# EAGLE board wsjt (EAGLE 9.6.2)
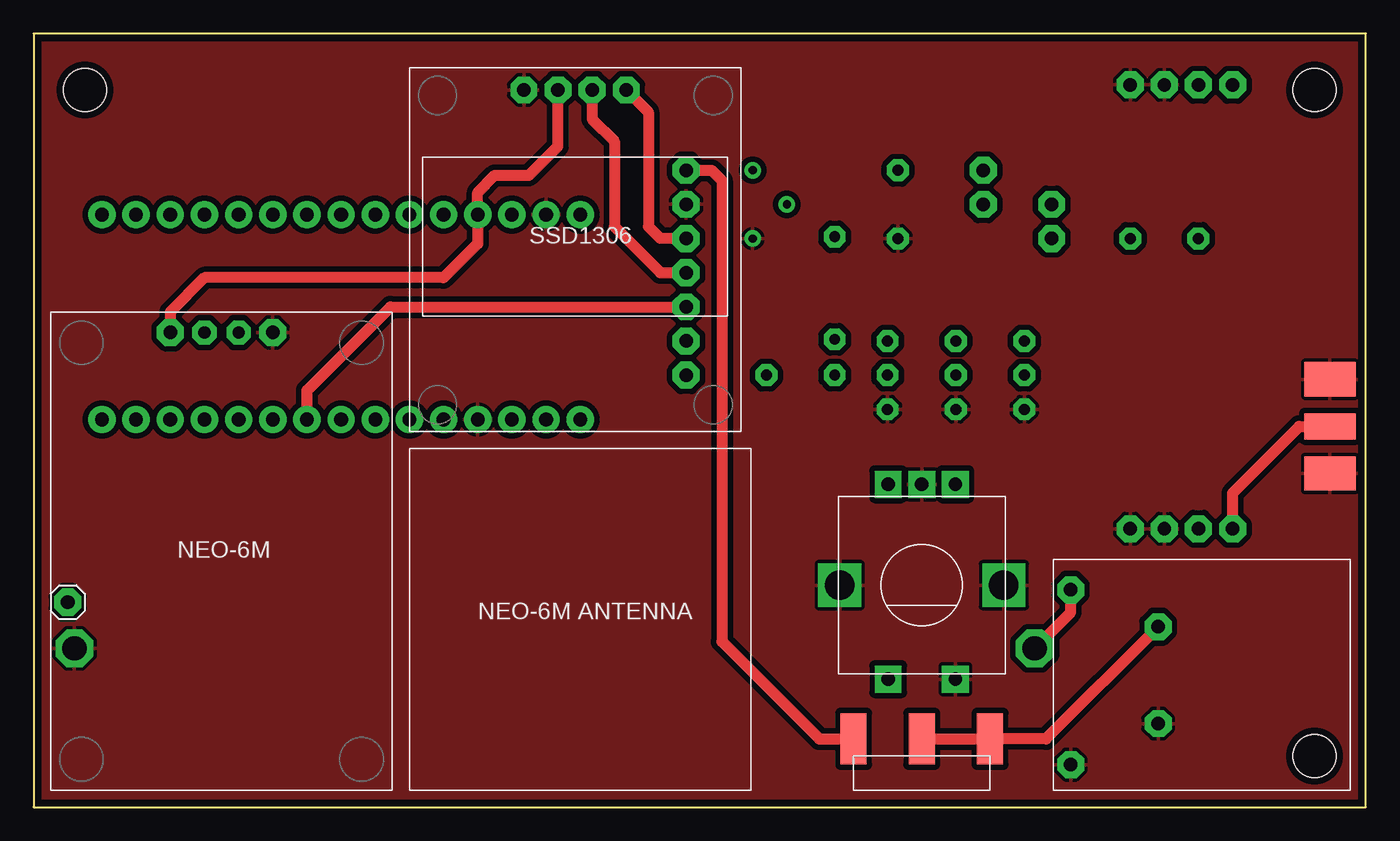
[diagram p0: board, top side]
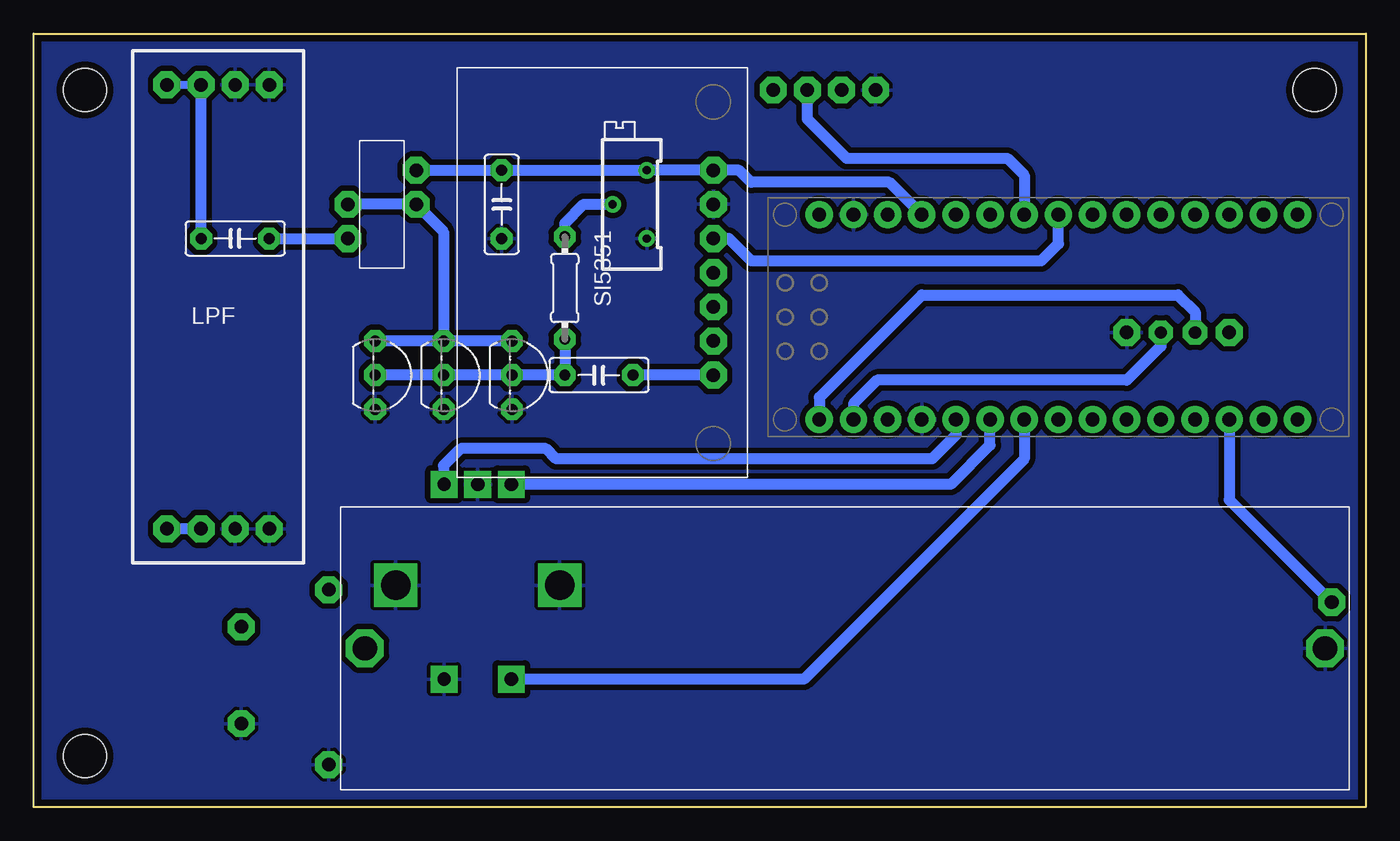
[diagram p1: board, bottom side, seen from below]

Size 99.06 x 57.53 mm. Coordinates in mm from the lower left corner, seen from the top.
Outline: 0,0 99.06,0 99.06,57.53 0,57.53 0,0
Copper layers (1*16): Top 0.035mm / dielectric 1.5mm / Bottom 0.035mm
Design rules "default *": minimum track width 6mil, minimum drill 0.35mm, track to track 6mil, track to pad 6mil, pad to pad 6mil, via to via 6mil, smd to smd 6mil, copper to edge 20mil, drill to drill 6mil, minimum pad ring 10mil, minimum via ring 8mil, stop-mask expansion 4mil, vias tented up to drill 0mil, thermal gap 10mil
Holes 3.2 mm at 3.81,53.34 95.25,3.81 95.25,53.34

## Footprints (pad centres in the part's own frame; a part is rotated, then mirrored left to right if it is on the bottom)
18650 = drill 1.8 octagon: 1 -35.7,0; 2 35.7,0
NANO = drill 1.016: 1 -7.62,17.78; 2 -7.62,15.24; 3 -7.62,12.7; 4 -7.62,10.16; 5 -7.62,7.62; 6 -7.62,5.08; 7 -7.62,2.54; 8 -7.62,0; 9 -7.62,-2.54; 10 -7.62,-5.08; 11 -7.62,-7.62; 12 -7.62,-10.16; 13 -7.62,-12.7; 14 -7.62,-15.24; 15 -7.62,-17.78; 16 7.62,-17.78; 17 7.62,-15.24; 18 7.62,-12.7; 19 7.62,-10.16; 20 7.62,-7.62; 21 7.62,-5.08; 22 7.62,-2.54; 23 7.62,0; 24 7.62,2.54; 25 7.62,5.08; 26 7.62,7.62; 27 7.62,10.16; 28 7.62,12.7; 29 7.62,15.24; 30 7.62,17.78
SSD1306 = drill 1 octagon: 1 11.049,25.4; 2 8.509,25.4; 3 13.589,25.4; 4 16.129,25.4
NEO6M = drill 0.9 octagon: 1 -1.27,16.256; 2 1.27,16.256 | drill 1 octagon: 3 3.81,16.256; 4 -3.81,16.256
SI5351 = drill 1 octagon: 1 0,-7.62; 2 -2.54,-7.62; 3 -5.08,-7.62; 4 -7.62,-7.62; 5 2.54,-7.62; 6 5.08,-7.62; 7 7.62,-7.62
ALPS_EC12E_SW = drill 1 square: A -2.5,-7.5; B 2.5,-7.5; C 0,-7.5; D -2.5,7; E 2.5,7 | drill 2.2 square: GND1 -6.1,0; GND2 6.1,0
1X01 = drill 1.016 octagon: 1 0,0
CHARGER = drill 1 octagon: P$1 -6.259,-9.114; P$2 6.741,-9.114; P$3 -3.509,-2.614; P$4 3.691,-2.614
C050-025X075 = drill 0.813 octagon: 1 -2.54,0; 2 2.54,0
LPF = drill 1 octagon: P$1 -3.81,-16.51; P$2 -1.27,-16.51; P$3 1.27,-16.51; P$4 3.81,-16.51; P$5 -3.81,16.51; P$6 -1.27,16.51; P$7 1.27,16.51; P$8 3.81,16.51
TO92- = drill 0.813 octagon: 1 -2.54,0; 2 0,0; 3 2.54,0
RTRIM64Z = drill 0.61: 1 0,-2.54; 2 -2.54,0; 3 0,2.54
0204/7 = drill 0.813 octagon: 1 -3.81,0; 2 3.81,0
T37-6-2 = drill 1 octagon: P$1 -2.54,-2.54; P$2 2.54,2.54; P$3 -2.54,0; P$4 2.54,0
SMA = smd 3.81 x 1.93: P$1 -1.905,0 | smd 3.81 x 2.54: P$2 -1.905,3.5; P$3 -1.905,-3.5
SWITCH = smd 1.93 x 3.81: P$1 0,5.08; P$2 -5.08,5.08; P$3 5.08,5.08

## Placement (x,y rotation side)
E$1  [18650]  38.73,11.81 0 bottom
E$2  [NANO]  22.86,36.45 90 bottom
E$3  [SSD1306]  27.94,27.94 0 top
E$4  [NEO6M]  13.97,19.05 0 top
E$5  [SI5351]  56.13,39.75 90 bottom
E$6  [ALPS_EC12E_SW]  66.04,16.51 180 top
E$7  [1X01]  2.54,15.24 0 top
E$8  [NEO6M_ANTENNA]  27.94,1.27 0 top
E$9  [CHARGER]  86.23,9.91 270 top
E$10  [C050-025X075]  57.02,32.13 180 bottom
E$11  [C050-025X075]  64.26,44.83 270 bottom
E$12  [LPF]  85.34,37.21 180 bottom
E$13  [C050-025X075]  84.07,42.29 180 bottom
E$14  [TO92-]  63.5,32.13 270 bottom
E$15  [TO92-]  68.58,32.13 270 bottom
E$16  [TO92-]  73.66,32.13 270 bottom
E$17  [RTRIM64Z]  53.47,44.83 0 bottom
E$18  [0204/7]  59.56,38.61 90 bottom
E$19  [T37-6-2]  73.15,44.83 0 bottom
E$20  [SMA]  98.3,28.32 0 top
E$21  [SWITCH]  66.04,0 0 top

## Library data of the parts
E$1 E$3-E$5 E$8 E$9 E$12 E$19-E$21 = WSJT
E$2 = SparkFun-Boards
E$6 = switch-alps
E$7 = pinhead
E$10 E$11 E$13 E$17 E$18 = rcl
E$14-E$16 = maxim

## Nets
GND: E$1.2 E$2.4 E$2.29 E$3.2 E$4.3 E$5.6 E$6.C E$6.D E$6.GND1 E$6.GND2 E$9.P$2 E$9.P$4 E$11.2 E$12.P$1 E$12.P$2 E$12.P$5 E$12.P$6 E$14.3 E$15.3 E$16.3 E$17.1 E$20.P$2 E$20.P$3
S$1: E$17.2 E$18.2
S$2: E$2.24 E$3.3 E$5.1
S$3: E$2.23 E$3.4 E$5.5
S$4: E$2.9 E$5.2
S$5: E$2.1 E$4.1
S$6: E$2.2 E$4.2
S$7: E$2.13 E$7.1
S$8: E$12.P$7 E$12.P$8 E$20.P$1
S$9: E$2.5 E$6.A
S$10: E$2.6 E$6.B
S$11: E$12.P$3 E$12.P$4 E$13.2
S$12: E$2.7 E$6.E
S$13: E$5.4 E$10.1
S$14: E$1.1
S$15: E$10.2 E$14.2 E$15.2 E$16.2 E$18.1
S$16: E$13.1 E$19.P$1
S$17: E$14.1 E$15.1 E$16.1 E$19.P$3 E$19.P$4
S$18: E$2.27 E$3.1 E$4.4 E$5.7 E$11.1 E$17.3 E$19.P$2 E$21.P$2
S$19: E$9.P$3 E$21.P$1 E$21.P$3

## Tracks (layer width: path | path; a pad name or v marks a point on that pad's centre or on a via)
GND
  pour Bottom (isolate 0.406): 0,0 0,57.53 99.06,57.53 99.06,0
  pour Top (isolate 0.406): 0,0 0,57.53 99.06,57.53 99.06,0
S$1
  Bottom 0.813: E$17.2 58.17,44.83 59.56,43.43 E$18.2
S$2
  Top 0.813: E$5.1 46.61,39.75 43.18,43.18 43.18,49.53 41.53,51.18 E$3.3
  Bottom 0.813: E$3.3 41.53,51.18 38.61,48.26 26.67,48.26 25.4,46.99 E$2.24
S$3
  Top 0.813: 47.88,42.29 E$5.5 46.61,42.29 45.72,43.18 45.72,51.69 E$3.4
  Bottom 0.813: E$5.5 47.37,42.29 45.72,40.64 24.13,40.64 22.86,41.91 E$2.23
S$4
  Top 0.813: E$5.2 26.54,37.21 20.32,30.99 E$2.9
S$5
  Bottom 0.813: E$2.1 40.64,30.48 33.02,38.1 13.97,38.1 12.7,36.83 E$4.1
S$6
  Bottom 0.813: E$2.2 38.1,30 36.35,31.75 17.78,31.75 15.24,34.29 E$4.2
S$7
  Bottom 0.813: E$2.13 10.16,22.86 E$7.1
S$8
  Top 0.813: E$12.P$8 89.15,23.37 94.11,28.32 E$20.P$1
  Bottom 0.813: E$12.P$7 E$12.P$8
S$9
  Bottom 0.813: E$6.A 68.58,24.05 68.58,25.4 67.31,26.67 60.96,26.67 60.2,25.91 32.26,25.91 30.48,27.69 E$2.5
S$10
  Bottom 0.813: E$2.6 27.94,26.92 30.86,24 E$6.B
S$11
  Bottom 0.61: E$12.P$4 E$12.P$3
  Bottom 0.813: E$13.2 E$12.P$3
S$12
  Bottom 0.813: E$2.7 25.4,25.91 41.8,9.51 E$6.E
S$13
  Bottom 0.813: E$5.4 E$10.1
S$14
  Top 0.813: E$1.1 77.12,14.49 77.12,16.16
S$15
  Bottom 0.813: E$16.2 E$15.2 E$14.2 E$10.2 E$18.1
S$16
  Bottom 0.813: E$13.1 E$19.P$1
S$17
  Bottom 0.813: E$14.1 E$15.1 | E$15.1 E$16.1 | E$15.1 68.58,42.8 E$19.P$4 E$19.P$3
S$18
  Top 0.813: E$4.4 10.16,36.83 12.7,39.37 30.48,39.37 33.02,41.91 E$2.27 33.02,45.72 34.29,46.99 36.83,46.99 38.99,49.15 E$3.1 | E$5.7 50.42,47.37 51.18,46.61 51.18,12.32 58.42,5.08 E$21.P$2
  Bottom 0.813: E$19.P$2 E$11.1 E$17.3 E$5.7 46.61,47.37 45.72,46.48 35.43,46.48 E$2.27
S$19
  Top 0.813: E$9.P$3 75.28,5.08 E$21.P$3 E$21.P$1